# Altium PCB PCB1.PcbDoc (part 1 of 2)
Units mm, origin at the board's own origin, x right, y up, seen from the top; angles counter-clockwise.
Board outline 102 x 101.22 mm, 2 copper layers (Top Layer, Bottom Layer); 182 components, 6 nets, 441 pads, 0 vias.
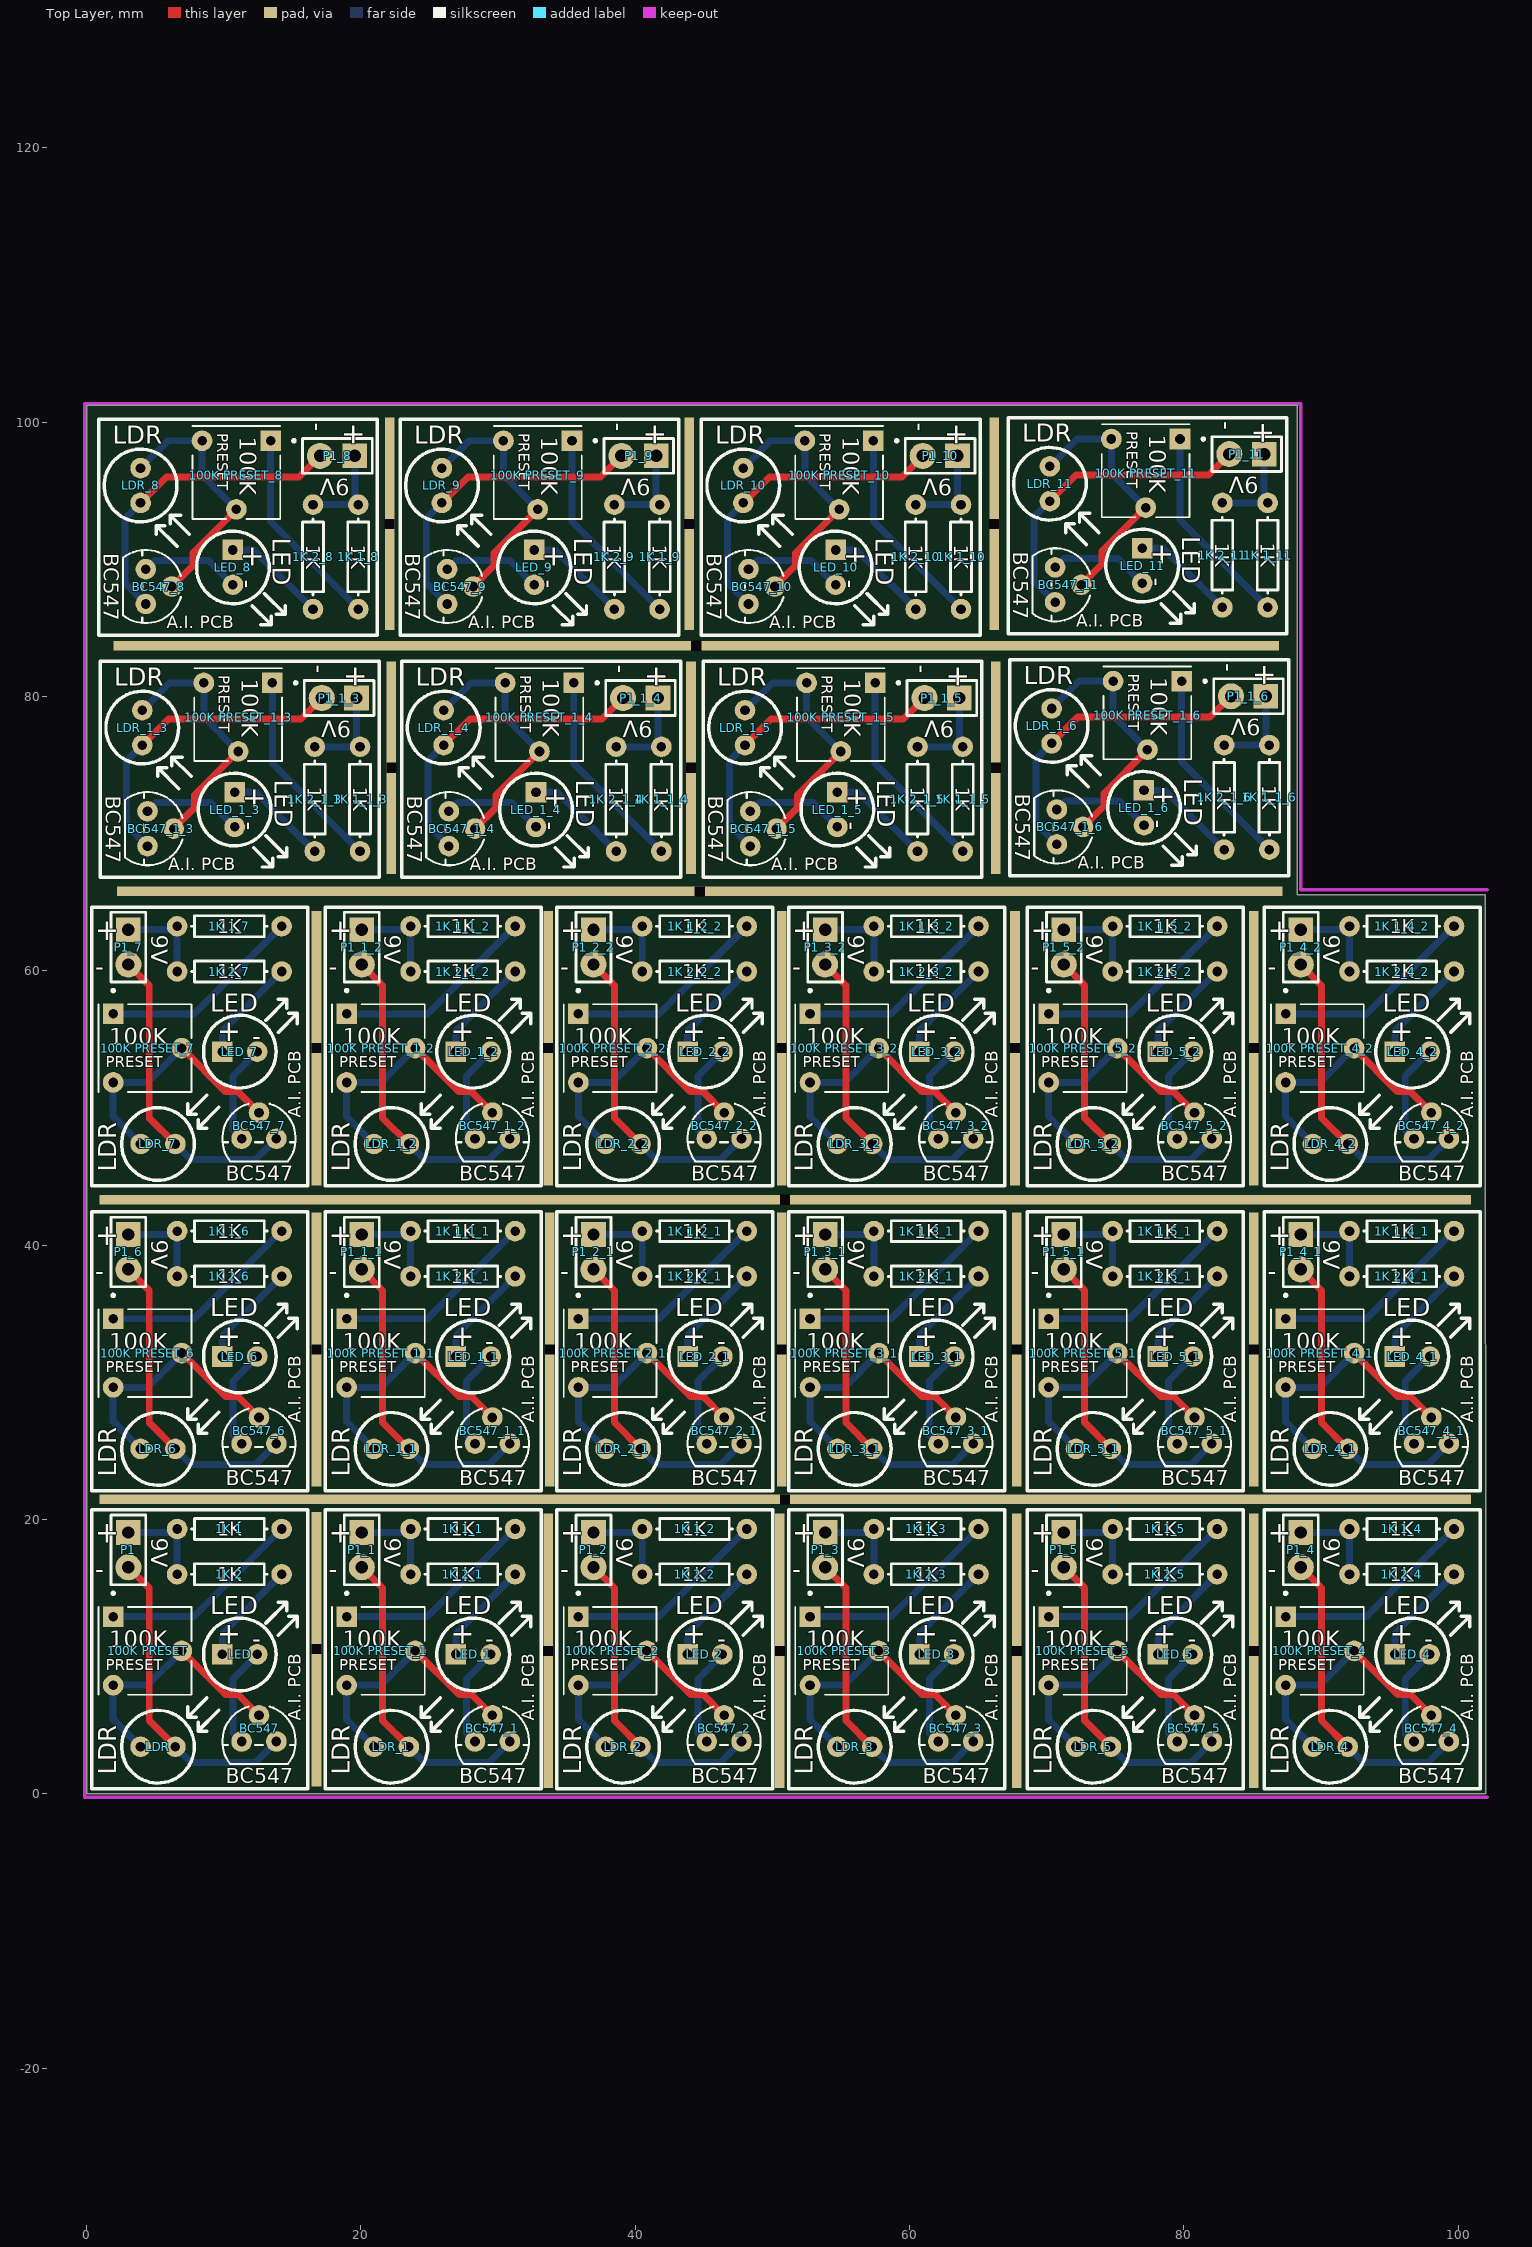
[diagram p0: Top Layer view]
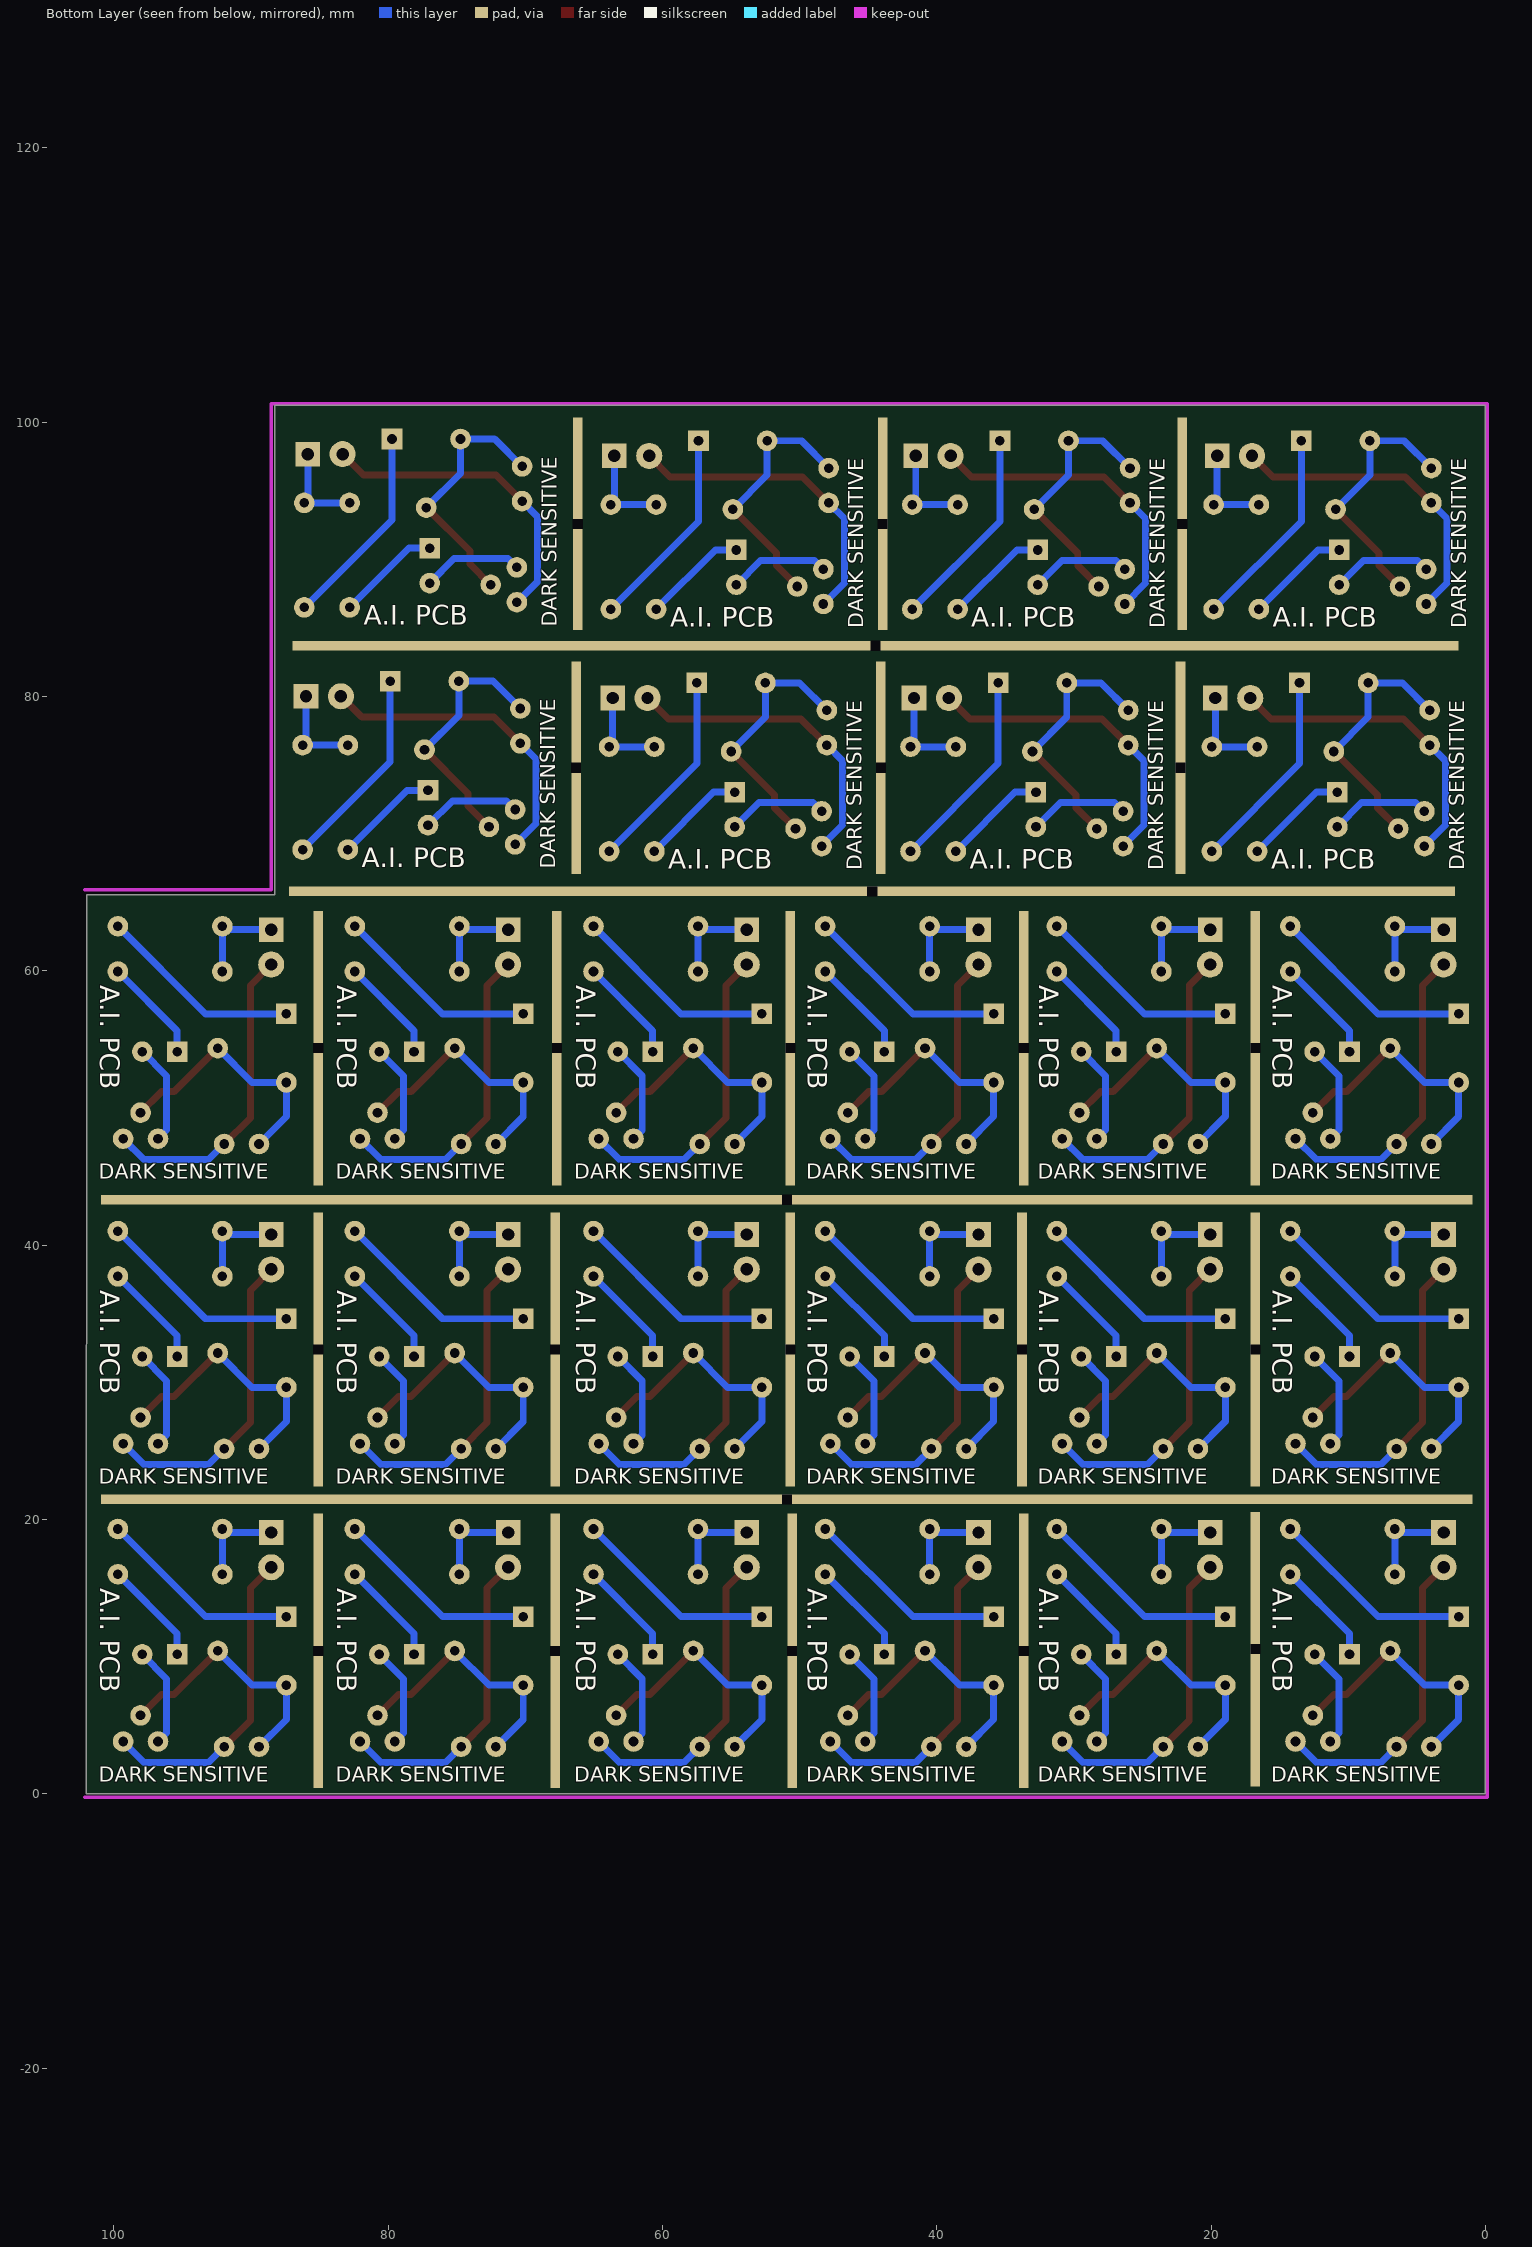
[diagram p1: Bottom Layer view, seen from below]

## Layer stack, top to bottom
Top Solder: solder mask 0.0102, Solder Resist, Dk 3.5
Top Layer: signal copper 0.0356
Dielectric 1: dielectric 0.32, FR-4, Dk 4.8
Bottom Layer: signal copper 0.0356
Bottom Solder: solder mask 0.0102, Solder Resist, Dk 3.5

## Board outline
0,0 0,101.219 88.265,101.219 88.265,65.532 101.981,65.532 102,0

## Design rules (kind name [scope] priority, off if disabled: settings)
Clearance [All] p1: gap=0.254 ignorepadtopadclearanceinfootprint=FALSE except(0: Arc-Hole Track-Hole SMDPad-Hole THPad-Hole Via-Hole Fill-Hole Poly-Hole Region-Hole Text-Hole)
PolygonConnect [All] p1: connectstyle=Relief reliefconductorwidth=0.254 reliefentries=4 polygonreliefangle="90 Angle" airgapwidth=0.254
RoutingVias [All] p1: holewidth=0.711 width=1.27 viastyle="Through Hole" minholewidth=0.711 minwidth=1.27 maxholewidth=0.711 maxwidth=1.27
SolderMaskExpansion [All] p1: expansion=0.102
Width [All] p1: maxlimit=0.762 minlimit=0.254 preferedwidth=0.508
30 further rules are at their usual default settings.

## Classes and differential pairs
component class Sheet1: "1K 1" "1K 2" "100K PRESET" BC547 LDR LED P1

## Components (designator, comment, footprint, x,y, rotation, side; value= is the part's Value field where it differs from the comment)
"1K 1" "Res1" AXIAL-0.3 10.414,19.304 r180 top value=1K
"1K 1_1" "Res1" AXIAL-0.3 27.432,19.304 r180 top value=1K (schematic designator "1K 1")
"1K 1_1_1" "Res1" AXIAL-0.3 27.432,41.021 r180 top value=1K (schematic designator "1K 1")
"1K 1_1_2" "Res1" AXIAL-0.3 27.432,63.246 r180 top value=1K (schematic designator "1K 1")
"1K 1_1_3" "Res1" AXIAL-0.3 19.939,72.517 r90 top value=1K (schematic designator "1K 1")
"1K 1_1_4" "Res1" AXIAL-0.3 41.91,72.517 r90 top value=1K (schematic designator "1K 1")
"1K 1_1_5" "Res1" AXIAL-0.3 63.881,72.517 r90 top value=1K (schematic designator "1K 1")
"1K 1_1_6" "Res1" AXIAL-0.3 86.233,72.644 r90 top value=1K (schematic designator "1K 1")
"1K 1_2" "Res1" AXIAL-0.3 44.323,19.304 r180 top value=1K (schematic designator "1K 1")
"1K 1_2_1" "Res1" AXIAL-0.3 44.323,41.021 r180 top value=1K (schematic designator "1K 1")
"1K 1_2_2" "Res1" AXIAL-0.3 44.323,63.246 r180 top value=1K (schematic designator "1K 1")
"1K 1_3" "Res1" AXIAL-0.3 61.214,19.304 r180 top value=1K (schematic designator "1K 1")
"1K 1_3_1" "Res1" AXIAL-0.3 61.214,41.021 r180 top value=1K (schematic designator "1K 1")
"1K 1_3_2" "Res1" AXIAL-0.3 61.214,63.246 r180 top value=1K (schematic designator "1K 1")
"1K 1_4" "Res1" AXIAL-0.3 95.885,19.304 r180 top value=1K (schematic designator "1K 1")
"1K 1_4_1" "Res1" AXIAL-0.3 95.885,41.021 r180 top value=1K (schematic designator "1K 1")
"1K 1_4_2" "Res1" AXIAL-0.3 95.885,63.246 r180 top value=1K (schematic designator "1K 1")
"1K 1_5" "Res1" AXIAL-0.3 78.613,19.304 r180 top value=1K (schematic designator "1K 1")
"1K 1_5_1" "Res1" AXIAL-0.3 78.613,41.021 r180 top value=1K (schematic designator "1K 1")
"1K 1_5_2" "Res1" AXIAL-0.3 78.613,63.246 r180 top value=1K (schematic designator "1K 1")
"1K 1_6" "Res1" AXIAL-0.3 10.414,41.021 r180 top value=1K (schematic designator "1K 1")
"1K 1_7" "Res1" AXIAL-0.3 10.414,63.246 r180 top value=1K (schematic designator "1K 1")
"1K 1_8" "Res1" AXIAL-0.3 19.812,90.17 r90 top value=1K (schematic designator "1K 1")
"1K 1_9" "Res1" AXIAL-0.3 41.783,90.17 r90 top value=1K (schematic designator "1K 1")
"1K 1_10" "Res1" AXIAL-0.3 63.754,90.17 r90 top value=1K (schematic designator "1K 1")
"1K 1_11" "Res1" AXIAL-0.3 86.106,90.297 r90 top value=1K (schematic designator "1K 1")
"1K 2" "Res1" AXIAL-0.3 10.414,16.002 r180 top value=1K
"1K 2_1" "Res1" AXIAL-0.3 27.432,16.002 r180 top value=1K (schematic designator "1K 2")
"1K 2_1_1" "Res1" AXIAL-0.3 27.432,37.719 r180 top value=1K (schematic designator "1K 2")
"1K 2_1_2" "Res1" AXIAL-0.3 27.432,59.944 r180 top value=1K (schematic designator "1K 2")
"1K 2_1_3" "Res1" AXIAL-0.3 16.637,72.517 r90 top value=1K (schematic designator "1K 2")
"1K 2_1_4" "Res1" AXIAL-0.3 38.608,72.517 r90 top value=1K (schematic designator "1K 2")
"1K 2_1_5" "Res1" AXIAL-0.3 60.579,72.517 r90 top value=1K (schematic designator "1K 2")
"1K 2_1_6" "Res1" AXIAL-0.3 82.931,72.644 r90 top value=1K (schematic designator "1K 2")
"1K 2_2" "Res1" AXIAL-0.3 44.323,16.002 r180 top value=1K (schematic designator "1K 2")
"1K 2_2_1" "Res1" AXIAL-0.3 44.323,37.719 r180 top value=1K (schematic designator "1K 2")
"1K 2_2_2" "Res1" AXIAL-0.3 44.323,59.944 r180 top value=1K (schematic designator "1K 2")
"1K 2_3" "Res1" AXIAL-0.3 61.214,16.002 r180 top value=1K (schematic designator "1K 2")
"1K 2_3_1" "Res1" AXIAL-0.3 61.214,37.719 r180 top value=1K (schematic designator "1K 2")
"1K 2_3_2" "Res1" AXIAL-0.3 61.214,59.944 r180 top value=1K (schematic designator "1K 2")
"1K 2_4" "Res1" AXIAL-0.3 95.885,16.002 r180 top value=1K (schematic designator "1K 2")
"1K 2_4_1" "Res1" AXIAL-0.3 95.885,37.719 r180 top value=1K (schematic designator "1K 2")
"1K 2_4_2" "Res1" AXIAL-0.3 95.885,59.944 r180 top value=1K (schematic designator "1K 2")
"1K 2_5" "Res1" AXIAL-0.3 78.613,16.002 r180 top value=1K (schematic designator "1K 2")
"1K 2_5_1" "Res1" AXIAL-0.3 78.613,37.719 r180 top value=1K (schematic designator "1K 2")
"1K 2_5_2" "Res1" AXIAL-0.3 78.613,59.944 r180 top value=1K (schematic designator "1K 2")
"1K 2_6" "Res1" AXIAL-0.3 10.414,37.719 r180 top value=1K (schematic designator "1K 2")
"1K 2_7" "Res1" AXIAL-0.3 10.414,59.944 r180 top value=1K (schematic designator "1K 2")
"1K 2_8" "Res1" AXIAL-0.3 16.51,90.17 r90 top value=1K (schematic designator "1K 2")
"1K 2_9" "Res1" AXIAL-0.3 38.481,90.17 r90 top value=1K (schematic designator "1K 2")
"1K 2_10" "Res1" AXIAL-0.3 60.452,90.17 r90 top value=1K (schematic designator "1K 2")
"1K 2_11" "Res1" AXIAL-0.3 82.804,90.297 r90 top value=1K (schematic designator "1K 2")
"100K PRESET" "" *TRIM_EVN-D8AA03B14 4.445,10.414 r270 top
"100K PRESET_1" "" *TRIM_EVN-D8AA03B14 21.463,10.414 r270 top (schematic designator "100K PRESET")
"100K PRESET_1_1" "" *TRIM_EVN-D8AA03B14 21.463,32.131 r270 top (schematic designator "100K PRESET")
"100K PRESET_1_2" "" *TRIM_EVN-D8AA03B14 21.463,54.356 r270 top (schematic designator "100K PRESET")
"100K PRESET_1_3" "" *TRIM_EVN-D8AA03B14 11.049,78.486 r180 top (schematic designator "100K PRESET")
"100K PRESET_1_4" "" *TRIM_EVN-D8AA03B14 33.02,78.486 r180 top (schematic designator "100K PRESET")
"100K PRESET_1_5" "" *TRIM_EVN-D8AA03B14 54.991,78.486 r180 top (schematic designator "100K PRESET")
"100K PRESET_1_6" "" *TRIM_EVN-D8AA03B14 77.343,78.613 r180 top (schematic designator "100K PRESET")
"100K PRESET_2" "" *TRIM_EVN-D8AA03B14 38.354,10.414 r270 top (schematic designator "100K PRESET")
"100K PRESET_2_1" "" *TRIM_EVN-D8AA03B14 38.354,32.131 r270 top (schematic designator "100K PRESET")
"100K PRESET_2_2" "" *TRIM_EVN-D8AA03B14 38.354,54.356 r270 top (schematic designator "100K PRESET")
"100K PRESET_3" "" *TRIM_EVN-D8AA03B14 55.245,10.414 r270 top (schematic designator "100K PRESET")
"100K PRESET_3_1" "" *TRIM_EVN-D8AA03B14 55.245,32.131 r270 top (schematic designator "100K PRESET")
"100K PRESET_3_2" "" *TRIM_EVN-D8AA03B14 55.245,54.356 r270 top (schematic designator "100K PRESET")
"100K PRESET_4" "" *TRIM_EVN-D8AA03B14 89.916,10.414 r270 top (schematic designator "100K PRESET")
"100K PRESET_4_1" "" *TRIM_EVN-D8AA03B14 89.916,32.131 r270 top (schematic designator "100K PRESET")
"100K PRESET_4_2" "" *TRIM_EVN-D8AA03B14 89.916,54.356 r270 top (schematic designator "100K PRESET")
"100K PRESET_5" "" *TRIM_EVN-D8AA03B14 72.644,10.414 r270 top (schematic designator "100K PRESET")
"100K PRESET_5_1" "" *TRIM_EVN-D8AA03B14 72.644,32.131 r270 top (schematic designator "100K PRESET")
"100K PRESET_5_2" "" *TRIM_EVN-D8AA03B14 72.644,54.356 r270 top (schematic designator "100K PRESET")
"100K PRESET_6" "" *TRIM_EVN-D8AA03B14 4.445,32.131 r270 top (schematic designator "100K PRESET")
"100K PRESET_7" "" *TRIM_EVN-D8AA03B14 4.445,54.356 r270 top (schematic designator "100K PRESET")
"100K PRESET_8" "" *TRIM_EVN-D8AA03B14 10.922,96.139 r180 top (schematic designator "100K PRESET")
"100K PRESET_9" "" *TRIM_EVN-D8AA03B14 32.893,96.139 r180 top (schematic designator "100K PRESET")
"100K PRESET_10" "" *TRIM_EVN-D8AA03B14 54.864,96.139 r180 top (schematic designator "100K PRESET")
"100K PRESET_11" "" *TRIM_EVN-D8AA03B14 77.216,96.266 r180 top (schematic designator "100K PRESET")
BC547 "BC547*" *TO92 12.573,3.81 r0 top
BC547_1 "BC547*" *TO92 29.591,3.81 r0 top (schematic designator BC547)
BC547_1_1 "BC547*" *TO92 29.591,25.527 r0 top (schematic designator BC547)
BC547_1_2 "BC547*" *TO92 29.591,47.752 r0 top (schematic designator BC547)
BC547_1_3 "BC547*" *TO92 4.445,70.358 r270 top (schematic designator BC547)
BC547_1_4 "BC547*" *TO92 26.416,70.358 r270 top (schematic designator BC547)
BC547_1_5 "BC547*" *TO92 48.387,70.358 r270 top (schematic designator BC547)
BC547_1_6 "BC547*" *TO92 70.739,70.485 r270 top (schematic designator BC547)
BC547_2 "BC547*" *TO92 46.482,3.81 r0 top (schematic designator BC547)
BC547_2_1 "BC547*" *TO92 46.482,25.527 r0 top (schematic designator BC547)
BC547_2_2 "BC547*" *TO92 46.482,47.752 r0 top (schematic designator BC547)
BC547_3 "BC547*" *TO92 63.373,3.81 r0 top (schematic designator BC547)
BC547_3_1 "BC547*" *TO92 63.373,25.527 r0 top (schematic designator BC547)
BC547_3_2 "BC547*" *TO92 63.373,47.752 r0 top (schematic designator BC547)
BC547_4 "BC547*" *TO92 98.044,3.81 r0 top (schematic designator BC547)
BC547_4_1 "BC547*" *TO92 98.044,25.527 r0 top (schematic designator BC547)
BC547_4_2 "BC547*" *TO92 98.044,47.752 r0 top (schematic designator BC547)
BC547_5 "BC547*" *TO92 80.772,3.81 r0 top (schematic designator BC547)
BC547_5_1 "BC547*" *TO92 80.772,25.527 r0 top (schematic designator BC547)
BC547_5_2 "BC547*" *TO92 80.772,47.752 r0 top (schematic designator BC547)
BC547_6 "BC547*" *TO92 12.573,25.527 r0 top (schematic designator BC547)
BC547_7 "BC547*" *TO92 12.573,47.752 r0 top (schematic designator BC547)
BC547_8 "BC547*" *TO92 4.318,88.011 r270 top (schematic designator BC547)
BC547_9 "BC547*" *TO92 26.289,88.011 r270 top (schematic designator BC547)
BC547_10 "BC547*" *TO92 48.26,88.011 r270 top (schematic designator BC547)
BC547_11 "BC547*" *TO92 70.612,88.138 r270 top (schematic designator BC547)
LDR "L-53GD" L-53GD#1 5.207,3.429 r0 top
LDR_1 "L-53GD" L-53GD#1 22.225,3.429 r0 top (schematic designator LDR)
LDR_1_1 "L-53GD" L-53GD#1 22.225,25.146 r0 top (schematic designator LDR)
LDR_1_2 "L-53GD" L-53GD#1 22.225,47.371 r0 top (schematic designator LDR)
LDR_1_3 "L-53GD" L-53GD#1 4.064,77.724 r270 top (schematic designator LDR)
LDR_1_4 "L-53GD" L-53GD#1 26.035,77.724 r270 top (schematic designator LDR)
LDR_1_5 "L-53GD" L-53GD#1 48.006,77.724 r270 top (schematic designator LDR)
LDR_1_6 "L-53GD" L-53GD#1 70.358,77.851 r270 top (schematic designator LDR)
LDR_2 "L-53GD" L-53GD#1 39.116,3.429 r0 top (schematic designator LDR)
LDR_2_1 "L-53GD" L-53GD#1 39.116,25.146 r0 top (schematic designator LDR)
LDR_2_2 "L-53GD" L-53GD#1 39.116,47.371 r0 top (schematic designator LDR)
LDR_3 "L-53GD" L-53GD#1 56.007,3.429 r0 top (schematic designator LDR)
LDR_3_1 "L-53GD" L-53GD#1 56.007,25.146 r0 top (schematic designator LDR)
LDR_3_2 "L-53GD" L-53GD#1 56.007,47.371 r0 top (schematic designator LDR)
LDR_4 "L-53GD" L-53GD#1 90.678,3.429 r0 top (schematic designator LDR)
LDR_4_1 "L-53GD" L-53GD#1 90.678,25.146 r0 top (schematic designator LDR)
LDR_4_2 "L-53GD" L-53GD#1 90.678,47.371 r0 top (schematic designator LDR)
LDR_5 "L-53GD" L-53GD#1 73.406,3.429 r0 top (schematic designator LDR)
LDR_5_1 "L-53GD" L-53GD#1 73.406,25.146 r0 top (schematic designator LDR)
LDR_5_2 "L-53GD" L-53GD#1 73.406,47.371 r0 top (schematic designator LDR)
LDR_6 "L-53GD" L-53GD#1 5.207,25.146 r0 top (schematic designator LDR)
LDR_7 "L-53GD" L-53GD#1 5.207,47.371 r0 top (schematic designator LDR)
LDR_8 "L-53GD" L-53GD#1 3.937,95.377 r270 top (schematic designator LDR)
LDR_9 "L-53GD" L-53GD#1 25.908,95.377 r270 top (schematic designator LDR)
LDR_10 "L-53GD" L-53GD#1 47.879,95.377 r270 top (schematic designator LDR)
LDR_11 "L-53GD" L-53GD#1 70.231,95.504 r270 top (schematic designator LDR)
LED "L-53GD" L-53GD#2 11.176,10.16 r0 top
LED_1 "L-53GD" L-53GD#2 28.194,10.16 r0 top (schematic designator LED)
LED_1_1 "L-53GD" L-53GD#2 28.194,31.877 r0 top (schematic designator LED)
LED_1_2 "L-53GD" L-53GD#2 28.194,54.102 r0 top (schematic designator LED)
LED_1_3 "L-53GD" L-53GD#2 10.795,71.755 r270 top (schematic designator LED)
LED_1_4 "L-53GD" L-53GD#2 32.766,71.755 r270 top (schematic designator LED)
LED_1_5 "L-53GD" L-53GD#2 54.737,71.755 r270 top (schematic designator LED)
LED_1_6 "L-53GD" L-53GD#2 77.089,71.882 r270 top (schematic designator LED)
LED_2 "L-53GD" L-53GD#2 45.085,10.16 r0 top (schematic designator LED)
LED_2_1 "L-53GD" L-53GD#2 45.085,31.877 r0 top (schematic designator LED)
LED_2_2 "L-53GD" L-53GD#2 45.085,54.102 r0 top (schematic designator LED)
LED_3 "L-53GD" L-53GD#2 61.976,10.16 r0 top (schematic designator LED)
LED_3_1 "L-53GD" L-53GD#2 61.976,31.877 r0 top (schematic designator LED)
LED_3_2 "L-53GD" L-53GD#2 61.976,54.102 r0 top (schematic designator LED)
LED_4 "L-53GD" L-53GD#2 96.647,10.16 r0 top (schematic designator LED)
LED_4_1 "L-53GD" L-53GD#2 96.647,31.877 r0 top (schematic designator LED)
LED_4_2 "L-53GD" L-53GD#2 96.647,54.102 r0 top (schematic designator LED)
LED_5 "L-53GD" L-53GD#2 79.375,10.16 r0 top (schematic designator LED)
LED_5_1 "L-53GD" L-53GD#2 79.375,31.877 r0 top (schematic designator LED)
LED_5_2 "L-53GD" L-53GD#2 79.375,54.102 r0 top (schematic designator LED)
LED_6 "L-53GD" L-53GD#2 11.176,31.877 r0 top (schematic designator LED)
LED_7 "L-53GD" L-53GD#2 11.176,54.102 r0 top (schematic designator LED)
LED_8 "L-53GD" L-53GD#2 10.668,89.408 r270 top (schematic designator LED)
LED_9 "L-53GD" L-53GD#2 32.639,89.408 r270 top (schematic designator LED)
LED_10 "L-53GD" L-53GD#2 54.61,89.408 r270 top (schematic designator LED)
LED_11 "L-53GD" L-53GD#2 76.962,89.535 r270 top (schematic designator LED)
P1 "Header 2" HDR1X2 3.048,19.05 r270 top
P1_1 "Header 2" HDR1X2 20.066,19.05 r270 top (schematic designator P1)
P1_1_1 "Header 2" HDR1X2 20.066,40.767 r270 top (schematic designator P1)
P1_1_2 "Header 2" HDR1X2 20.066,62.992 r270 top (schematic designator P1)
P1_1_3 "Header 2" HDR1X2 19.685,79.883 r180 top (schematic designator P1)
P1_1_4 "Header 2" HDR1X2 41.656,79.883 r180 top (schematic designator P1)
P1_1_5 "Header 2" HDR1X2 63.627,79.883 r180 top (schematic designator P1)
P1_1_6 "Header 2" HDR1X2 85.979,80.01 r180 top (schematic designator P1)
P1_2 "Header 2" HDR1X2 36.957,19.05 r270 top (schematic designator P1)
P1_2_1 "Header 2" HDR1X2 36.957,40.767 r270 top (schematic designator P1)
P1_2_2 "Header 2" HDR1X2 36.957,62.992 r270 top (schematic designator P1)
P1_3 "Header 2" HDR1X2 53.848,19.05 r270 top (schematic designator P1)
P1_3_1 "Header 2" HDR1X2 53.848,40.767 r270 top (schematic designator P1)
P1_3_2 "Header 2" HDR1X2 53.848,62.992 r270 top (schematic designator P1)
P1_4 "Header 2" HDR1X2 88.519,19.05 r270 top (schematic designator P1)
P1_4_1 "Header 2" HDR1X2 88.519,40.767 r270 top (schematic designator P1)
P1_4_2 "Header 2" HDR1X2 88.519,62.992 r270 top (schematic designator P1)
P1_5 "Header 2" HDR1X2 71.247,19.05 r270 top (schematic designator P1)
P1_5_1 "Header 2" HDR1X2 71.247,40.767 r270 top (schematic designator P1)
P1_5_2 "Header 2" HDR1X2 71.247,62.992 r270 top (schematic designator P1)
P1_6 "Header 2" HDR1X2 3.048,40.767 r270 top (schematic designator P1)
P1_7 "Header 2" HDR1X2 3.048,62.992 r270 top (schematic designator P1)
P1_8 "Header 2" HDR1X2 19.558,97.536 r180 top (schematic designator P1)
P1_9 "Header 2" HDR1X2 41.529,97.536 r180 top (schematic designator P1)
P1_10 "Header 2" HDR1X2 63.5,97.536 r180 top (schematic designator P1)
P1_11 "Header 2" HDR1X2 85.852,97.663 r180 top (schematic designator P1)

## Footprints (in the part's own frame and the unit in brackets; to place one, negate y for a bottom-side part, rotate by r counter-clockwise, add the part's x,y. Pads: shape width x height; smd on the part's side, far side on the other; paste and mask are expansions set on the pad)
*TO92 [mm]
  round 1.5 hole 0.7: 1(-1.27,0) 2(0,1.905) 3(1.27,0)
  Top Layer region: -0.608,0.241 -0.972,0.638 -1.511,0.662 -1.908,0.298 -1.932,-0.241 -1.568,-0.638 -1.029,-0.662 -0.632,-0.298
  Top Layer region: 0.662,2.146 0.298,2.543 -0.241,2.567 -0.638,2.203 -0.662,1.664 -0.298,1.267 0.241,1.243 0.638,1.607
  Top Layer region: 1.932,0.241 1.568,0.638 1.029,0.662 0.632,0.298 0.608,-0.241 0.972,-0.638 1.511,-0.662 1.908,-0.298
  Bottom Layer region: -0.608,0.241 -0.972,0.638 -1.511,0.662 -1.908,0.298 -1.932,-0.241 -1.568,-0.638 -1.029,-0.662 -0.632,-0.298
  Bottom Layer region: 0.662,2.146 0.298,2.543 -0.241,2.567 -0.638,2.203 -0.662,1.664 -0.298,1.267 0.241,1.243 0.638,1.607
  Bottom Layer region: 1.932,0.241 1.568,0.638 1.029,0.662 0.632,0.298 0.608,-0.241 0.972,-0.638 1.511,-0.662 1.908,-0.298
  Multi-Layer region: -0.608,0.241 -0.972,0.638 -1.511,0.662 -1.908,0.298 -1.932,-0.241 -1.568,-0.638 -1.029,-0.662 -0.632,-0.298
  Multi-Layer region: 0.662,2.146 0.298,2.543 -0.241,2.567 -0.638,2.203 -0.662,1.664 -0.298,1.267 0.241,1.243 0.638,1.607
  Multi-Layer region: 1.932,0.241 1.568,0.638 1.029,0.662 0.632,0.298 0.608,-0.241 0.972,-0.638 1.511,-0.662 1.908,-0.298
  silkscreen extent -2.66,-1.65 2.66,2.55
*TRIM_EVN-D8AA03B14 [mm]
  rect 1.508x1.508 hole 0.7: 1(-2.5,-2.5)
  round 1.508 hole 0.7: 2(0,2.5) 3(2.5,-2.5)
  silkscreen extent -4.3,-3.57 3.2,3.2
AXIAL-0.3 [mm] "Axial Device, Thru-Hole; 2 Leads; 0.3 in Pin Spacing"
  round 1.5 hole 0.7: 1(-3.81,0) 2(3.81,0)
  silkscreen extent -2.77,-0.76 2.77,0.76
HDR1X2 [mm] "Connector; Header; 2 Position"
  rect 1.8x1.8 hole 0.9: 1(0,0)
  round 1.9 hole 0.9: 2(2.54,0)
  silkscreen extent -1.27,-1.27 3.81,1.27
L-53GD#1 [mm]
  round 1.5 hole 0.7: 1(-1.27,0) 2(1.27,0)
  silkscreen extent -2.65,-2.65 2.65,2.65
L-53GD#2 [mm]
  rect 1.5x1.5 hole 0.7: 1(-1.27,0)
  round 1.5 hole 0.7: 2(1.27,0)
  silkscreen extent -2.65,-2.65 2.65,2.65

## Part data
"1K 1" "1K 1_1" "1K 1_1_1" "1K 1_1_2" "1K 1_1_3" "1K 1_1_4" "1K 1_1_5" "1K 1_1_6" "1K 1_2" "1K 1_2_1" "1K 1_2_2" "1K 1_3" "1K 1_3_1" "1K 1_3_2" "1K 1_4" "1K 1_4_1" "1K 1_4_2" "1K 1_5" "1K 1_5_1" "1K 1_5_2" "1K 1_6" "1K 1_7" "1K 1_8" "1K 1_9" "1K 1_10" "1K 1_11" "1K 2" "1K 2_1" "1K 2_1_1" "1K 2_1_2" "1K 2_1_3" "1K 2_1_4" "1K 2_1_5" "1K 2_1_6" "1K 2_2" "1K 2_2_1" "1K 2_2_2" "1K 2_3" "1K 2_3_1" "1K 2_3_2" "1K 2_4" "1K 2_4_1" "1K 2_4_2" "1K 2_5" "1K 2_5_1" "1K 2_5_2" "1K 2_6" "1K 2_7" "1K 2_8" "1K 2_9" "1K 2_10" "1K 2_11": "Resistor", LatestRevisionDate=17-Jul-2002, LatestRevisionNote="Re-released for DXP Platform.", PackageDescription="Axial Device, Thru-Hole; 2 Leads; 0.3 in Pin Spacing", PackageReference=AXIAL-0.3, Published=8-Jun-2000, Publisher="Altium Limited"
"100K PRESET" "100K PRESET_1" "100K PRESET_1_1" "100K PRESET_1_2" "100K PRESET_1_3" "100K PRESET_1_4" "100K PRESET_1_5" "100K PRESET_1_6" "100K PRESET_2" "100K PRESET_2_1" "100K PRESET_2_2" "100K PRESET_3" "100K PRESET_3_1" "100K PRESET_3_2" "100K PRESET_4" "100K PRESET_4_1" "100K PRESET_4_2" "100K PRESET_5" "100K PRESET_5_1" "100K PRESET_5_2" "100K PRESET_6" "100K PRESET_7" "100K PRESET_8" "100K PRESET_9" "100K PRESET_10" "100K PRESET_11": library part EVN-D8AA03B14, "Trimmer; Carbon; Rest 10 Kilohms; PCB; 1 Turn; Pwr-Rtg 0.1 W; Linear; Top Adj; 6 mm SQ", Package="PQFP-44 Panasonic", Availability=Unavailable, MF="Panasonic Electronic", MP=EVN-D8AA03B14, Price=None, SnapEDA_Link=https://www.snapeda.com/parts/EVN-D8AA03B14/Panasonic%20Electronic%20Components/view-part/?ref=snap
BC547 BC547_1 BC547_1_1 BC547_1_2 BC547_1_3 BC547_1_4 BC547_1_5 BC547_1_6 BC547_2 BC547_2_1 BC547_2_2 BC547_3 BC547_3_1 BC547_3_2 BC547_4 BC547_4_1 BC547_4_2 BC547_5 BC547_5_1 BC547_5_2 BC547_6 BC547_7 BC547_8 BC547_9 BC547_10 BC547_11: "Transistor NPN BC547 PHILIPS miliampere=100 TO92", Package="TO-92 ON Semiconductor", Availability=Unavailable, MF="ON Semiconductor", MP=BC547, Price=None, SnapEDA_Link=https://www.snapeda.com/parts/BC547/ON%20Semiconductor/view-part/?ref=snap
LDR LDR_1 LDR_1_1 LDR_1_2 LDR_1_3 LDR_1_4 LDR_1_5 LDR_1_6 LDR_2 LDR_2_1 LDR_2_2 LDR_3 LDR_3_1 LDR_3_2 LDR_4 LDR_4_1 LDR_4_2 LDR_5 LDR_5_1 LDR_5_2 LDR_6 LDR_7 LDR_8 LDR_9 LDR_10 LDR_11 LED LED_1 LED_1_1 LED_1_2 LED_1_3 LED_1_4 LED_1_5 LED_1_6 LED_2 LED_2_1 LED_2_2 LED_3 LED_3_1 LED_3_2 LED_4 LED_4_1 LED_4_2 LED_5 LED_5_1 LED_5_2 LED_6 LED_7 LED_8 LED_9 LED_10 LED_11: "LED", Manufacturer_Name=Kingbright, Mouser Part Number=N/A, RS Part Number=2286004A, Allied_Number=70424261, Allied Price/Stock=http://www.alliedelec.com/kingbright-l-53gd/70424261/, Datasheet Link=http://docs-emea.rs-online.com/webdocs/151e/0900766b8151e408.pdf, Manufacturer_Part_Number=L-53GD, Mouser Price/Stock=https://www.mouser.com/Search/Refine.aspx?Keyword=N%2FA, RS Price/Stock=http://uk.rs-online.com/web/p/products/2286004A
P1 P1_1 P1_1_1 P1_1_2 P1_1_3 P1_1_4 P1_1_5 P1_1_6 P1_2 P1_2_1 P1_2_2 P1_3 P1_3_1 P1_3_2 P1_4 P1_4_1 P1_4_2 P1_5 P1_5_1 P1_5_2 P1_6 P1_7 P1_8 P1_9 P1_10 P1_11: "Header, 2-Pin", LatestRevisionDate=17-Jul-2002, LatestRevisionNote="Re-released for DXP Platform.", Publisher="Altium Limited"

## Free pads (board coordinates)
  rect 85x0.7 hole 0.7 square: 2(44.45,83.693) 2(44.704,65.786)
  rect 100x0.7 hole 0.7 square: 2(50.927,21.463) 2(50.927,43.307)
  rect 0.7x20 hole 0.7 square: 3(16.764,10.541) 3(16.764,32.385) 3(16.764,54.356) 3(33.655,10.414) 3(33.655,54.356) 3(33.782,32.385) 3(50.546,10.414) 3(50.673,32.385) 3(50.673,54.356) 3(67.691,54.356) 3(67.818,10.414) 3(67.818,32.385) 3(85.09,10.414) 3(85.09,32.385) 3(85.09,54.356)
  rect 0.7x15.5 hole 0.7 square: 3(22.098,92.583) 3(22.225,74.803) 3(43.942,92.583) 3(44.069,74.803) 3(66.167,92.583) 3(66.294,74.803)

## Nets (pads, with @x,y where several pads share a name; then routed paths per layer and width w, separated by ;. In a path a pad name is that pad's centre, name@x,y a point inside that pad or via, vN(x,y) a via of type N, cw(c..) or ccw(c..) an arc to the next point about the centre after c; other vN are vias at no path point)
"Net1K 1_1": "1K 1.1" "100K PRESET.1" | length 14.9
  Bottom Layer w0.508: 1.945,12.914 7.834,12.914 14.224,19.304
"Net1K 1_2": "1K 1.2" "1K 2.2" P1.1 | length 7
  Bottom Layer w0.508: P1.1@3.048,19.05 6.35,19.05 6.604,19.304 6.604,16.002
"Net1K 2_1": "1K 2.1" LED.1 | length 7.6
  Bottom Layer w0.508: LED.1@9.906,10.16 9.906,11.684 14.224,16.002
"Net100K PRESET_2": "100K PRESET.2" "100K PRESET.3" BC547.2 LDR.1 | length 18.9
  Top Layer w0.508: 6.945,10.414 10.12,7.239 11.049,7.239 BC547.2@12.573,5.715
  Bottom Layer w0.508: LDR.1@3.937,3.429 1.945,5.421 1.945,7.914 4.445,7.914 6.945,10.414
NetBC547_1: BC547.1 LED.2 | length 7.3
  Bottom Layer w0.508: BC547.1@11.303,3.81 10.668,4.445 10.668,8.382 LED.2@12.446,10.16
NetBC547_3: BC547.3 LDR.2 P1.2 | length 23
  Top Layer w0.508: P1.2@3.048,16.51 4.572,14.986 4.572,5.334 LDR.2@6.477,3.429
  Bottom Layer w0.508: LDR.2@6.477,3.429 7.62,2.286 12.319,2.286 BC547.3@13.843,3.81
pads on no net: "1K 1_1.1" "1K 1_1.2" "1K 1_1_1.1" "1K 1_1_1.2" "1K 1_1_2.1" "1K 1_1_2.2" "1K 1_1_3.1" "1K 1_1_3.2" "1K 1_1_4.1" "1K 1_1_4.2" "1K 1_1_5.1" "1K 1_1_5.2" "1K 1_1_6.1" "1K 1_1_6.2" "1K 1_2.1" "1K 1_2.2" "1K 1_2_1.1" "1K 1_2_1.2" "1K 1_2_2.1" "1K 1_2_2.2" "1K 1_3.1" "1K 1_3.2" "1K 1_3_1.1" "1K 1_3_1.2" "1K 1_3_2.1" "1K 1_3_2.2" "1K 1_4.1" "1K 1_4.2" "1K 1_4_1.1" "1K 1_4_1.2" "1K 1_4_2.1" "1K 1_4_2.2" "1K 1_5.1" "1K 1_5.2" "1K 1_5_1.1" "1K 1_5_1.2" "1K 1_5_2.1" "1K 1_5_2.2" "1K 1_6.1" "1K 1_6.2" "1K 1_7.1" "1K 1_7.2" "1K 1_8.1" "1K 1_8.2" "1K 1_9.1" "1K 1_9.2" "1K 1_10.1" "1K 1_10.2" "1K 1_11.1" "1K 1_11.2" "1K 2_1.1" "1K 2_1.2" "1K 2_1_1.1" "1K 2_1_1.2" "1K 2_1_2.1" "1K 2_1_2.2" "1K 2_1_3.1" "1K 2_1_3.2" "1K 2_1_4.1" "1K 2_1_4.2" "1K 2_1_5.1" "1K 2_1_5.2" "1K 2_1_6.1" "1K 2_1_6.2" "1K 2_2.1" "1K 2_2.2" "1K 2_2_1.1" "1K 2_2_1.2" "1K 2_2_2.1" "1K 2_2_2.2" "1K 2_3.1" "1K 2_3.2" "1K 2_3_1.1" "1K 2_3_1.2" "1K 2_3_2.1" "1K 2_3_2.2" "1K 2_4.1" "1K 2_4.2" "1K 2_4_1.1" "1K 2_4_1.2" "1K 2_4_2.1" "1K 2_4_2.2" "1K 2_5.1" "1K 2_5.2" "1K 2_5_1.1" "1K 2_5_1.2" "1K 2_5_2.1" "1K 2_5_2.2" "1K 2_6.1" "1K 2_6.2" "1K 2_7.1" "1K 2_7.2" "1K 2_8.1" "1K 2_8.2" "1K 2_9.1" "1K 2_9.2" "1K 2_10.1" "1K 2_10.2" "1K 2_11.1" "1K 2_11.2" "100K PRESET_1.1" "100K PRESET_1.2" "100K PRESET_1.3" "100K PRESET_1_1.1" "100K PRESET_1_1.2" "100K PRESET_1_1.3" "100K PRESET_1_2.1" "100K PRESET_1_2.2" "100K PRESET_1_2.3" "100K PRESET_1_3.1" "100K PRESET_1_3.2" "100K PRESET_1_3.3" "100K PRESET_1_4.1" "100K PRESET_1_4.2" "100K PRESET_1_4.3" "100K PRESET_1_5.1" "100K PRESET_1_5.2" "100K PRESET_1_5.3" "100K PRESET_1_6.1" "100K PRESET_1_6.2" "100K PRESET_1_6.3" "100K PRESET_2.1" "100K PRESET_2.2" "100K PRESET_2.3" "100K PRESET_2_1.1" "100K PRESET_2_1.2" "100K PRESET_2_1.3" "100K PRESET_2_2.1" "100K PRESET_2_2.2" "100K PRESET_2_2.3" "100K PRESET_3.1" "100K PRESET_3.2" "100K PRESET_3.3" "100K PRESET_3_1.1" "100K PRESET_3_1.2" "100K PRESET_3_1.3" "100K PRESET_3_2.1" "100K PRESET_3_2.2" "100K PRESET_3_2.3" "100K PRESET_4.1" "100K PRESET_4.2" "100K PRESET_4.3" "100K PRESET_4_1.1" "100K PRESET_4_1.2" "100K PRESET_4_1.3" "100K PRESET_4_2.1" "100K PRESET_4_2.2" "100K PRESET_4_2.3" "100K PRESET_5.1" "100K PRESET_5.2" "100K PRESET_5.3" "100K PRESET_5_1.1" "100K PRESET_5_1.2" "100K PRESET_5_1.3" "100K PRESET_5_2.1" "100K PRESET_5_2.2" "100K PRESET_5_2.3" "100K PRESET_6.1" "100K PRESET_6.2" "100K PRESET_6.3" "100K PRESET_7.1" "100K PRESET_7.2" "100K PRESET_7.3" "100K PRESET_8.1" "100K PRESET_8.2" "100K PRESET_8.3" "100K PRESET_9.1" "100K PRESET_9.2" "100K PRESET_9.3" "100K PRESET_10.1" "100K PRESET_10.2" "100K PRESET_10.3" "100K PRESET_11.1" "100K PRESET_11.2" "100K PRESET_11.3" BC547_1.1 BC547_1.2 BC547_1.3 BC547_1_1.1 BC547_1_1.2 BC547_1_1.3 BC547_1_2.1 BC547_1_2.2 BC547_1_2.3 BC547_1_3.1 BC547_1_3.2 BC547_1_3.3 BC547_1_4.1 BC547_1_4.2 BC547_1_4.3 BC547_1_5.1 BC547_1_5.2 BC547_1_5.3 BC547_1_6.1 BC547_1_6.2 BC547_1_6.3 BC547_2.1 BC547_2.2 BC547_2.3 BC547_2_1.1 BC547_2_1.2 BC547_2_1.3 BC547_2_2.1 BC547_2_2.2 BC547_2_2.3 BC547_3.1 BC547_3.2 BC547_3.3 BC547_3_1.1 BC547_3_1.2 BC547_3_1.3 BC547_3_2.1 BC547_3_2.2 BC547_3_2.3 BC547_4.1 BC547_4.2 BC547_4.3 BC547_4_1.1 BC547_4_1.2 BC547_4_1.3 BC547_4_2.1 BC547_4_2.2 BC547_4_2.3 BC547_5.1 BC547_5.2 BC547_5.3 BC547_5_1.1 BC547_5_1.2 BC547_5_1.3 BC547_5_2.1 BC547_5_2.2 BC547_5_2.3 BC547_6.1 BC547_6.2 BC547_6.3 BC547_7.1 BC547_7.2 BC547_7.3 BC547_8.1 BC547_8.2 BC547_8.3 BC547_9.1 BC547_9.2 BC547_9.3 BC547_10.1 BC547_10.2 BC547_10.3 BC547_11.1 BC547_11.2 BC547_11.3 LDR_1.1 LDR_1.2 LDR_1_1.1 LDR_1_1.2 LDR_1_2.1 LDR_1_2.2 LDR_1_3.1 LDR_1_3.2 LDR_1_4.1 LDR_1_4.2 LDR_1_5.1 LDR_1_5.2 LDR_1_6.1 LDR_1_6.2 LDR_2.1 LDR_2.2 LDR_2_1.1 LDR_2_1.2 LDR_2_2.1 LDR_2_2.2 LDR_3.1 LDR_3.2 LDR_3_1.1 LDR_3_1.2 LDR_3_2.1 LDR_3_2.2 LDR_4.1 LDR_4.2 LDR_4_1.1 LDR_4_1.2 LDR_4_2.1 LDR_4_2.2 LDR_5.1 LDR_5.2 LDR_5_1.1 LDR_5_1.2 LDR_5_2.1 LDR_5_2.2 LDR_6.1 LDR_6.2 LDR_7.1 LDR_7.2 LDR_8.1 LDR_8.2 LDR_9.1 LDR_9.2 LDR_10.1 LDR_10.2 LDR_11.1 LDR_11.2 LED_1.1 LED_1.2 LED_1_1.1 LED_1_1.2 LED_1_2.1 LED_1_2.2 LED_1_3.1 LED_1_3.2 LED_1_4.1 LED_1_4.2 LED_1_5.1 LED_1_5.2 LED_1_6.1 LED_1_6.2 LED_2.1 LED_2.2 LED_2_1.1 LED_2_1.2 LED_2_2.1 LED_2_2.2 LED_3.1 LED_3.2 LED_3_1.1 LED_3_1.2 LED_3_2.1 LED_3_2.2 LED_4.1 LED_4.2 LED_4_1.1 LED_4_1.2 LED_4_2.1 LED_4_2.2 LED_5.1 LED_5.2 LED_5_1.1 LED_5_1.2 LED_5_2.1 LED_5_2.2 LED_6.1 LED_6.2 LED_7.1 LED_7.2 LED_8.1 LED_8.2 LED_9.1 LED_9.2 LED_10.1 LED_10.2 LED_11.1 LED_11.2 P1_1.1 P1_1.2 P1_1_1.1 P1_1_1.2 P1_1_2.1 P1_1_2.2 P1_1_3.1 P1_1_3.2 P1_1_4.1 P1_1_4.2 P1_1_5.1 P1_1_5.2 P1_1_6.1 P1_1_6.2 P1_2.1 P1_2.2 P1_2_1.1 P1_2_1.2 P1_2_2.1 P1_2_2.2 P1_3.1 P1_3.2 P1_3_1.1 P1_3_1.2 P1_3_2.1 P1_3_2.2 P1_4.1 P1_4.2 P1_4_1.1 P1_4_1.2 P1_4_2.1 P1_4_2.2 P1_5.1 P1_5.2 P1_5_1.1 P1_5_1.2 P1_5_2.1 P1_5_2.2 P1_6.1 P1_6.2 P1_7.1 P1_7.2 P1_8.1 P1_8.2 P1_9.1 P1_9.2 P1_10.1 P1_10.2 P1_11.1 P1_11.2